# EAGLE board Tremendous Jaiks-Snicket (EAGLE 9.7.0)

Size 151.81 x 130.88 mm. Coordinates in mm from the lower left corner, seen from the top.
Outline: 0,0 151.81,0 151.81,130.88 0,130.88 0,0
Copper layers (1*16): Top 0.035mm / dielectric 1.5mm / Bottom 0.035mm
Design rules "default": minimum track width 6mil, minimum drill 0.35mm, track to track 6mil, track to pad 6mil, pad to pad 6mil, via to via 6mil, smd to smd 6mil, copper to edge 40mil, drill to drill 6mil, minimum pad ring 10mil, minimum via ring 8mil, stop-mask expansion 4mil, vias tented up to drill 0mil, thermal gap 10mil

## Footprints (pad centres in the part's own frame; a part is rotated, then mirrored left to right if it is on the bottom)
BATTERY-GENERIC = drill 1.118 pad 3.15 octagon: + 2.54,0; - -2.54,0
LEDRD254W60D565H860B = drill 0.981 pad 1.581: 1 -1.27,0; 2 1.27,0
RESAD1016W63L850D250B = drill 0.83 pad 1.43: 1 -5.08,0; 2 5.08,0
SWITCH-MOMENTARY-PTH-6.5MM = drill 1.016 pad 1.88: 1 -3.251,2.261; 2 3.251,2.261; 3 -3.251,-2.261; 4 3.251,-2.261

## Placement (x,y rotation side)
BAT1  9V  [BATTERY-GENERIC]  44.03,8.26 90 top
D1  RED  [LEDRD254W60D565H860B]  91.7,30.97 180 top
P1  BATTERYGENERIC  [BATTERY-GENERIC]  8.26,74.08 180 top
R1  220  [RESAD1016W63L850D250B]  145.48,29 90 top
R2  1k  [RESAD1016W63L850D250B]  106.73,96.62 90 top
S1  SWITCH_MOMENTARY  [SWITCH-MOMENTARY-PTH-6.5MM]  126.9,123.51 90 top

## Library data of the parts
BAT1 P1 R1 R2 S1 = Tinkercad
D1 = Tinkercad; CATEGORY: Opto-Electronic; SUB-CATEGORY: LED; VALUE: LED_RED

## Nets
D1_A: D1.1 R2.1
P1-: D1.2 P1.-
S1_3: R2.2 S1.3 S1.4

## Tracks (layer width: path | path; a pad name or v marks a point on that pad's centre or on a via)
D1_A  (1 unrouted)
P1-  (1 unrouted)
S1_3  (2 unrouted)